# Altium PCB PCB1.PcbDoc
Units mm, origin at the board's own origin, x right, y up, seen from the top; angles counter-clockwise.
Board outline 60 x 40 mm, 2 copper layers (Top Layer, Bottom Layer); 6 components, 5 nets, 18 pads, 0 vias.
Unrouted connection lines stored in the file: 12.
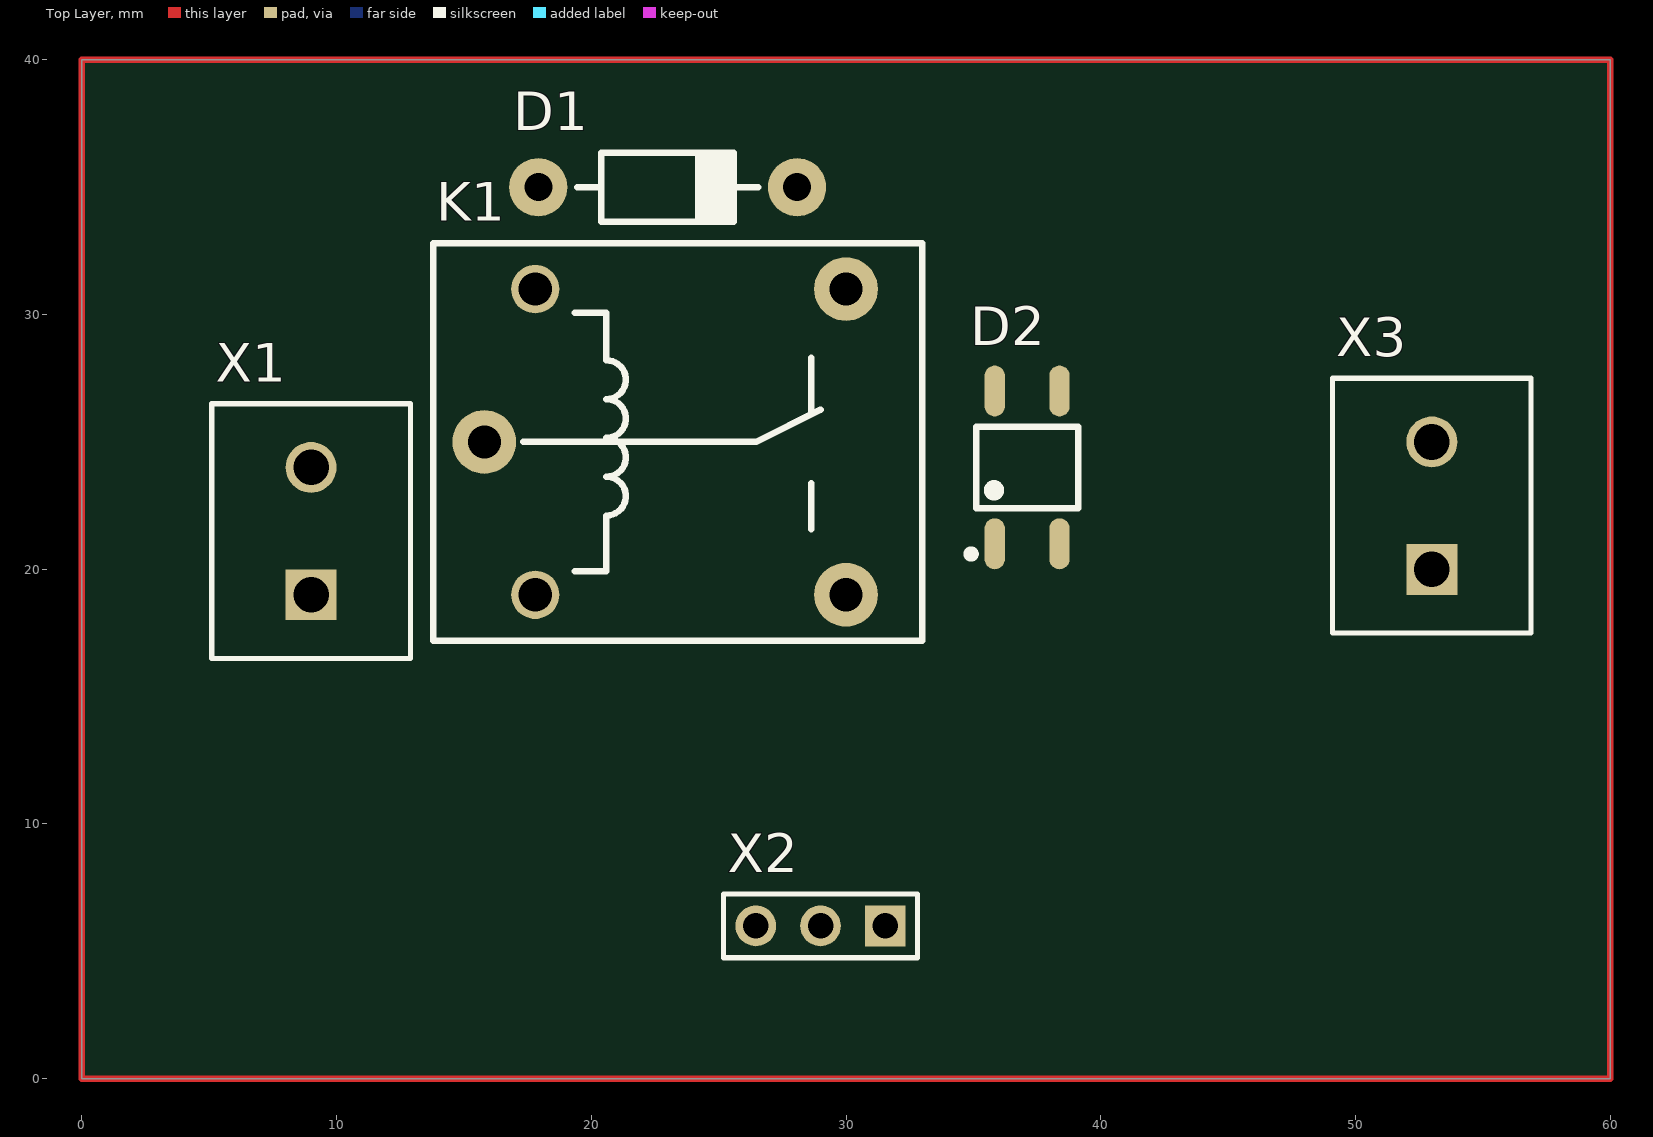
[diagram p0: Top Layer view]
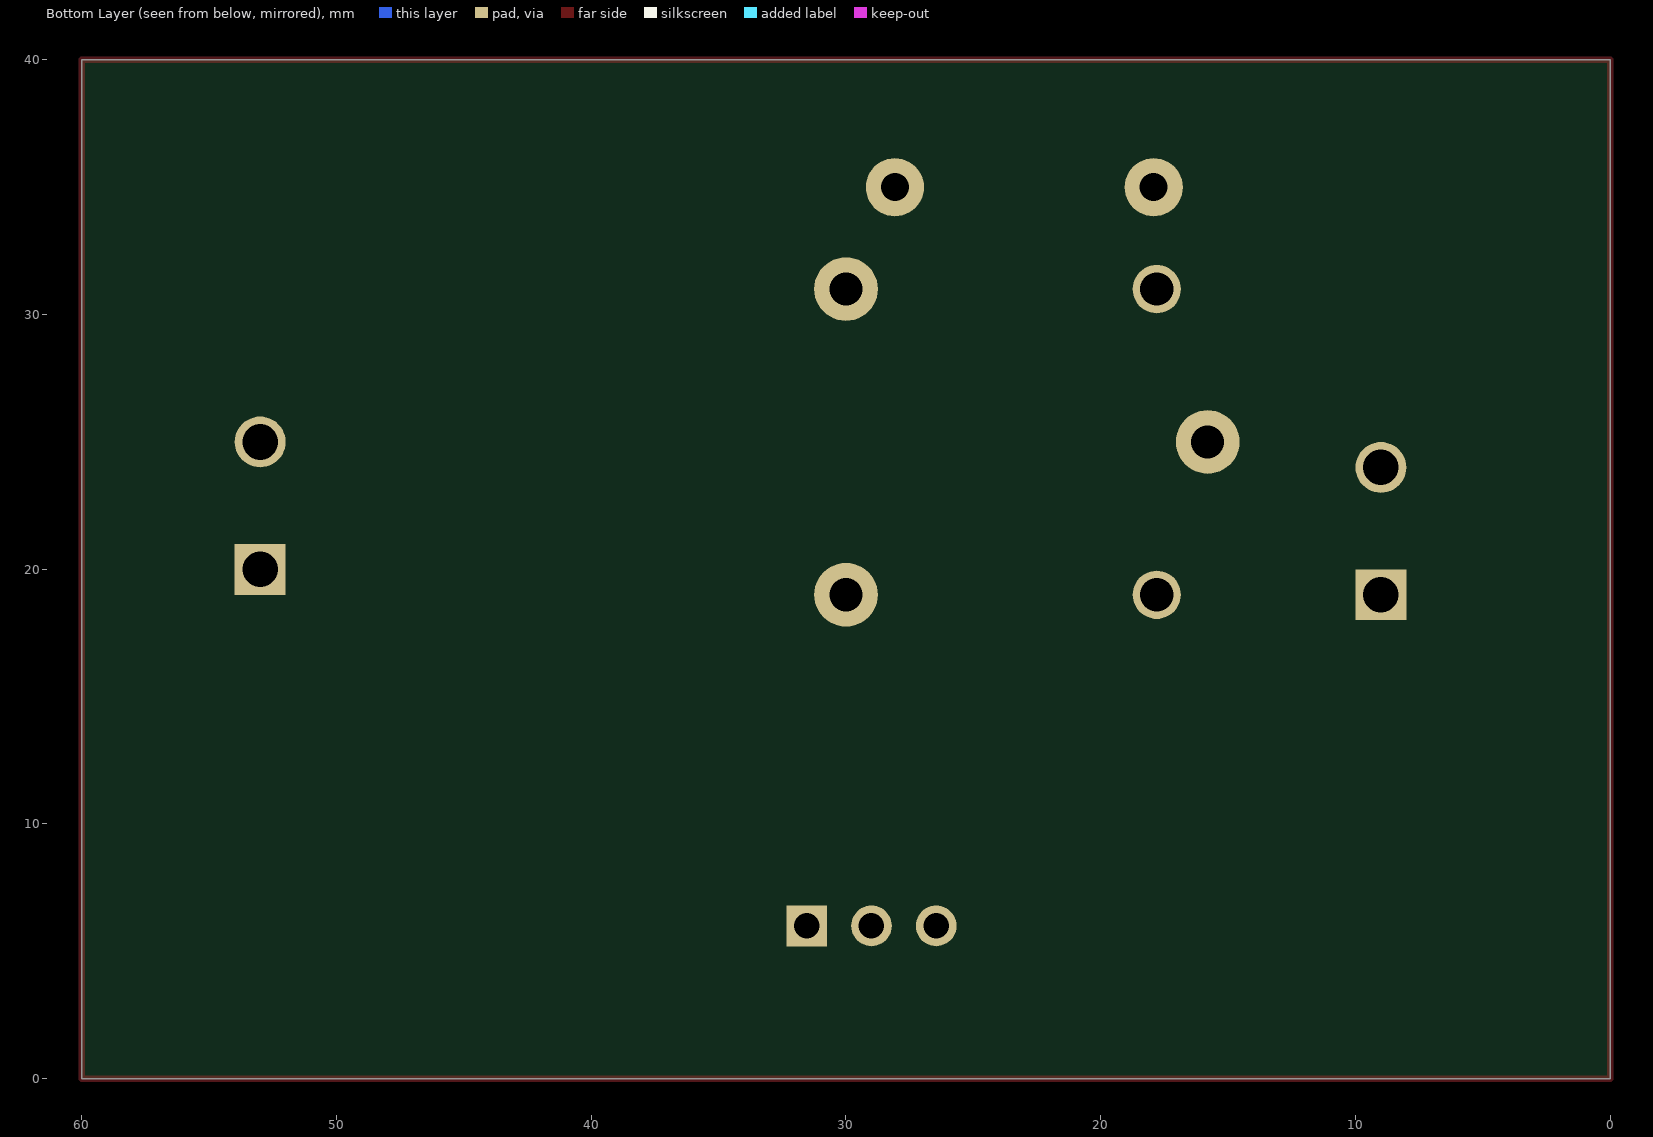
[diagram p1: Bottom Layer view, seen from below]

## Layer stack, top to bottom
Top Solder: solder mask 0.0102, Solder Resist, Dk 3.5
Top Layer: signal copper 0.0356
Dielectric 1: dielectric 0.32, FR-4, Dk 4.8
Bottom Layer: signal copper 0.0356
Bottom Solder: solder mask 0.0102, Solder Resist, Dk 3.5

## Board outline
0,0 0,40 60,40 60,0

## Design rules (kind name [scope] priority, off if disabled: settings)
Clearance [All] p1: gap=0.254 ignorepadtopadclearanceinfootprint=FALSE
PolygonConnect [All] p1: connectstyle=Relief reliefconductorwidth=0.254 reliefentries=4 polygonreliefangle="90 Angle" airgapwidth=0.254
RoutingVias [All] p1: holewidth=0.711 width=1.27 viastyle="Through Hole" minholewidth=0.711 minwidth=1.27 maxholewidth=0.711 maxwidth=1.27
SolderMaskExpansion [All] p1: expansion=0.102 istentingtop=FALSE
Width [All] p1: maxlimit=0.254 minlimit=0.254 preferedwidth=0.254
30 further rules are at their usual default settings.

## Components (designator, comment, footprint, x,y, rotation, side; value= is the part's Value field where it differs from the comment)
D1 "1N4007" DO-41_BD2.4-P10.16-D0.8-RD 23,35 r180 top
D2 "TPL127" SOP-4_L3.6-W4.4-P2.54-LS7.0-BL 37,24 r0 top
K1 "SRD-12VDC-SL-C" REALY-TH_012-1ZW_BK 15.8,25 r0 top
X1 "WJ126-5.0-02P-14-00A" WJ126-5.0 9,19 r90 top
X2 "PLS-3" PLS-3 31.54,6 r180 top
X3 "WJ126-5.0-02P-14-00A" WJ126-5.0 53,20 r90 top

## Footprints (in the part's own frame and the unit in brackets; to place one, negate y for a bottom-side part, rotate by r counter-clockwise, add the part's x,y. Pads: shape width x height; smd on the part's side, far side on the other; paste and mask are expansions set on the pad)
DO-41_BD2.4-P10.16-D0.8-RD [mil] "DO-41"
  round 90 hole 43.31: 1(-200,0) 2(200,0)
  silkscreen extent -140,-53 140,53, body extent -217,-53 217,53, height 107
PLS-3 [mm]
  rect 1.6x1.6 hole 1: 1(0,0)
  round 1.6 hole 1: 2(2.54,0) 3(5.08,0)
  silkscreen extent -1.27,-1.25 6.35,1.25
REALY-TH_012-1ZW_BK [mm] "µҐµ¶Л«Н¶"
  round 1.9 hole 1.3: 1(2,-6) 3(2,6)
  round 2.5 hole 1.3: 2(0,0) 4(14.2,6) 5(14.2,-6)
  silkscreen extent -2,-7.8 17.2,7.8
SOP-4_L3.6-W4.4-P2.54-LS7.0-BL [mm]
  oval 0.8x2 smd paste+0 mask+0.051: 1(-1.159,-3) 3(1.381,-3) 4(1.381,3) 6(-1.159,3)
  silkscreen extent -2.24,-3.55 2.11,1.6
WJ126-5.0 [mm]
  rect 2x2 hole 1.4: 1(0,0)
  round 2 hole 1.4: 2(5,0)
  silkscreen extent -2.5,-3.9 7.5,3.9

## Part data
D1: "Diode", Package=DO-41

## Nets (pads, with @x,y where several pads share a name; then routed paths per layer and width w, separated by ;. In a path a pad name is that pad's centre, name@x,y a point inside that pad or via, vN(x,y) a via of type N, cw(c..) or ccw(c..) an arc to the next point about the centre after c; other vN are vias at no path point)
+12V: D1.1 K1.1 X1.1 X2.1 X3.1
-LED: K1.2 X1.2
GND: D2.3 D2.4 K1.5 X2.3 X3.2
NetD1_2: D1.2 D2.6 K1.3
NetD2_1: D2.1 X2.2
pads on no net: K1.4
copper on no net: | length 200
  Top Layer w0.254: 0,0 60,0 60,40 0,40 0,0